# Altium PCB PCB.PcbDoc
Units mil, origin at the board's own origin, x right, y up, seen from the top; angles counter-clockwise.
Board outline 2990.1 x 1640.1 mil, 2 copper layers (Top Layer, Bottom Layer); 58 components, 36 nets, 149 pads, 4 vias.
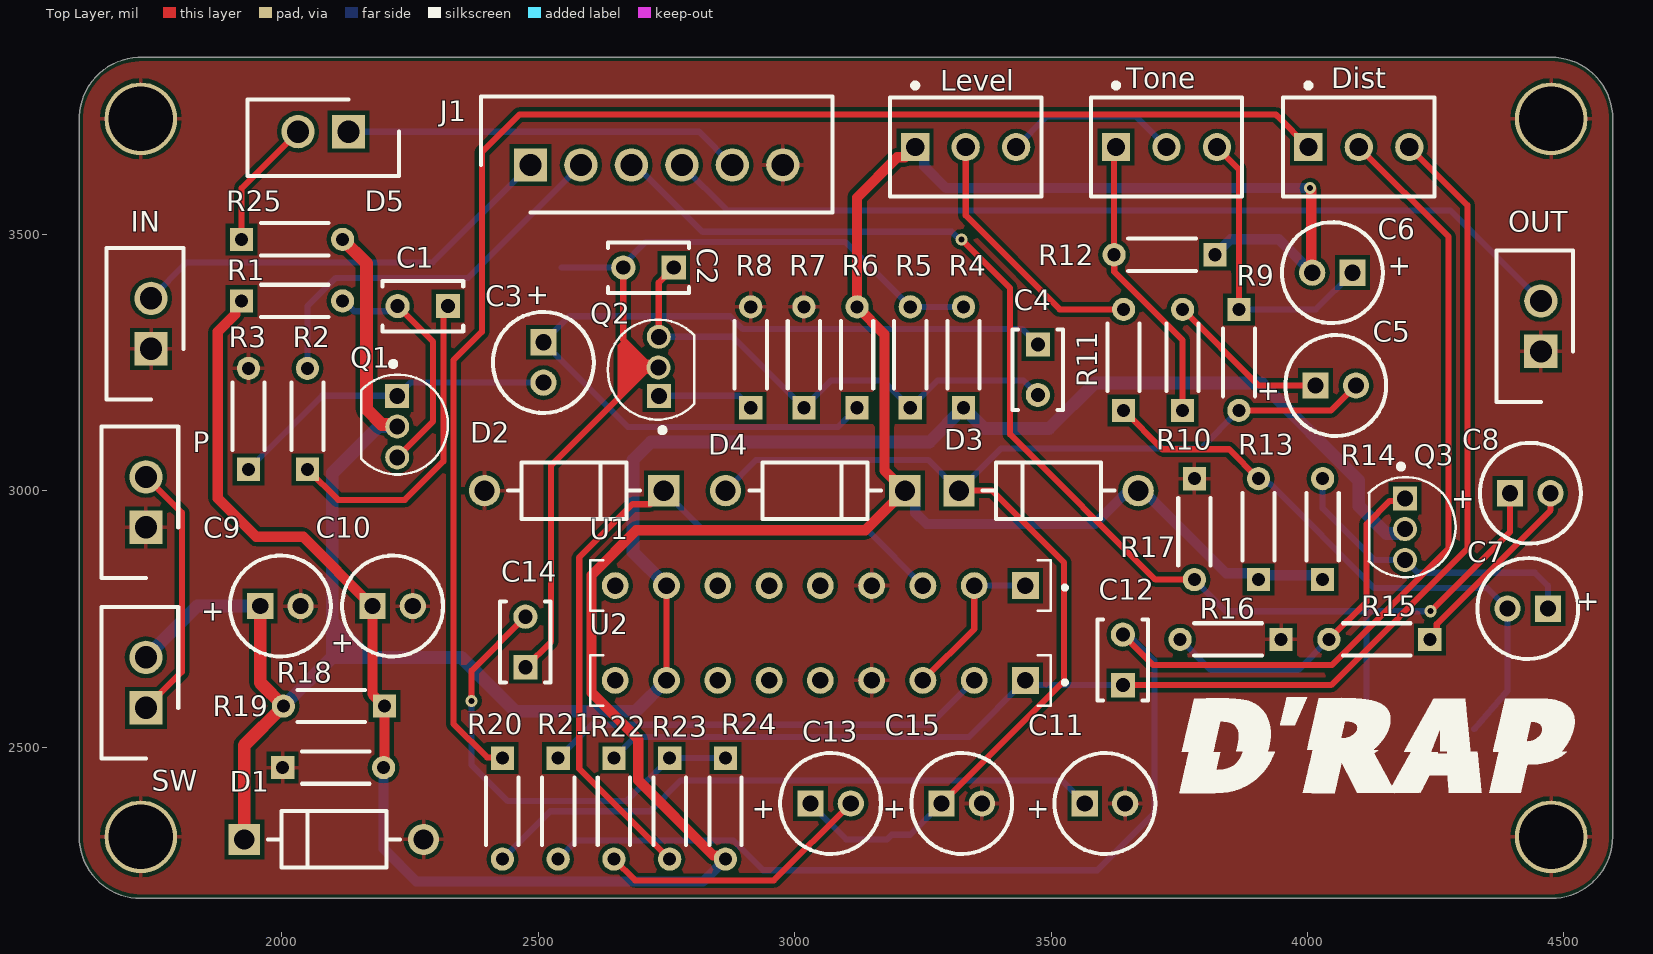
[diagram p0: Top Layer view]
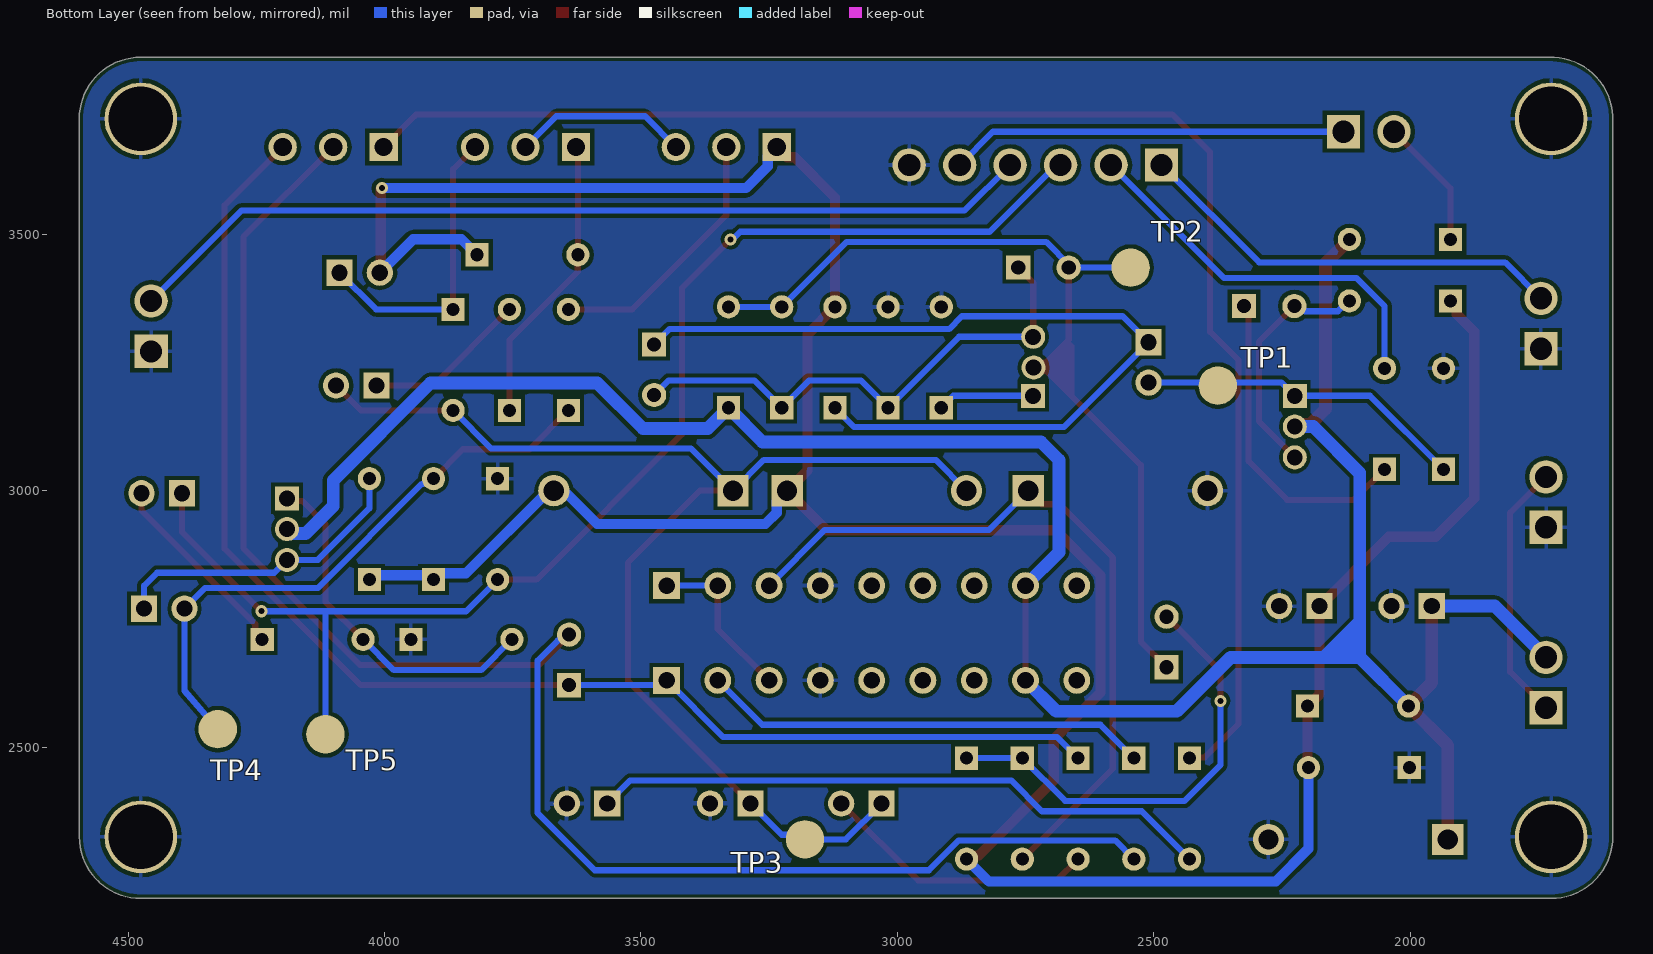
[diagram p1: Bottom Layer view, seen from below]
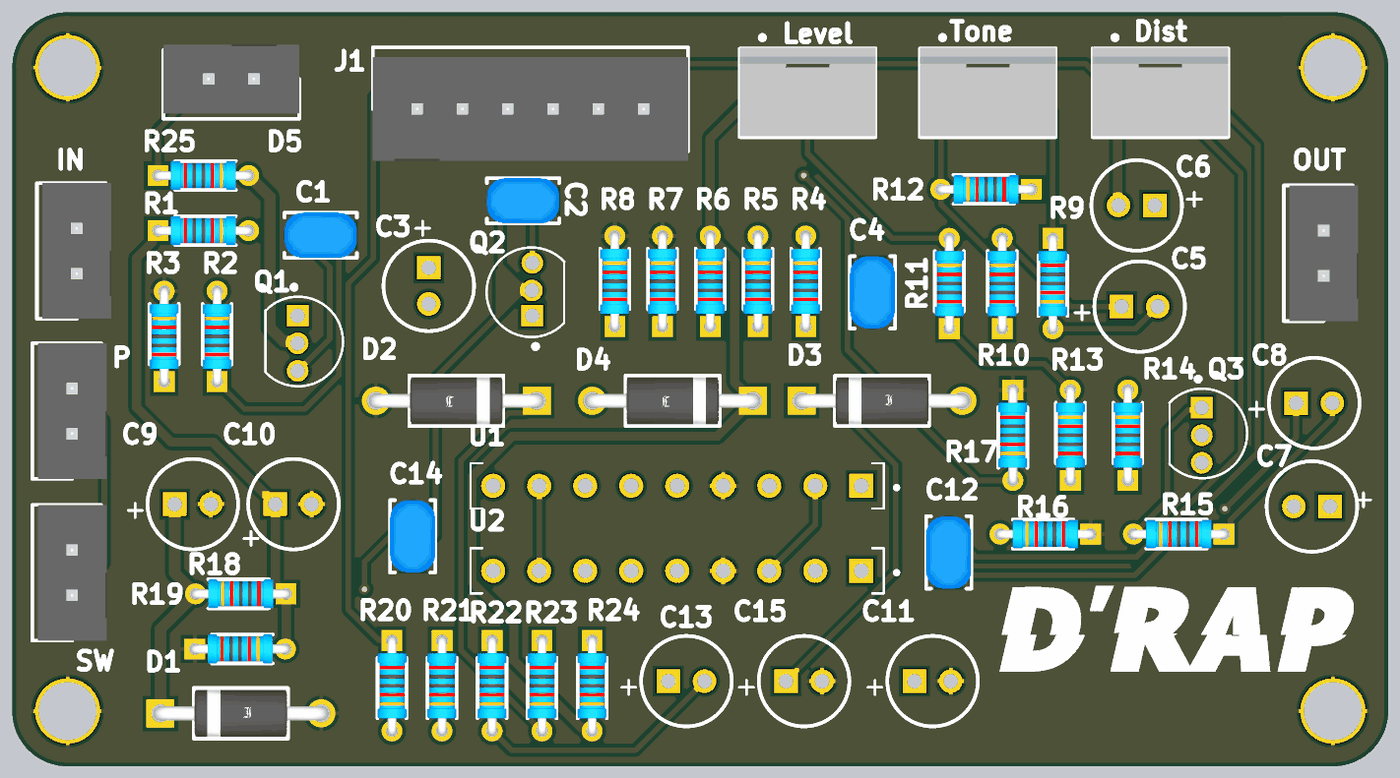
[diagram p2: 3D render of the assembled board from above, using the file's embedded part models]

## Layer stack, top to bottom
Top Solder: solder mask 0.4, Solder Resist, Dk 3.5
Top Layer: signal copper 1.4
Dielectric 1: dielectric 12.6, FR-4, Dk 4.8
Bottom Layer: signal copper 1.4
Bottom Solder: solder mask 0.4, Solder Resist, Dk 3.5

## Board outline
1725,2205 cw(c1725,2325) 1605,2325 1605,3720 cw(c1725,3725) 1730,3845 4474.9,3845 4475,3845.1 cw(c4475,3725) 4595.1,3725 4595.1,2325.1 4595,2325 cw(c4475,2325) 4475,2205

## Design rules (kind name [scope] priority, off if disabled: settings)
BoardOutlineClearance [All] p1: gap=7.87 ignorepadtopadclearanceinfootprint=FALSE
Clearance [All] p1: gap=8 ignorepadtopadclearanceinfootprint=FALSE except(9.84: Arc-Hole Track-Hole SMDPad-Hole THPad-Hole Via-Hole Fill-Hole Poly-Hole Region-Hole Text-Hole)
ComponentClearance [All] p1: gap=5 collisioncheckmode=3 verticalgap=5 showdistances=TRUE
DiffPairsRouting [All] p1: maxlimit=15 minlimit=8 mostfreqgap=8 toplayer_minwidth=8 toplayer_maxwidth=1000 toplayer_prefwidth=8 bottomlayer_minwidth=8 bottomlayer_maxwidth=1000 bottomlayer_prefwidth=8 maxuncoupledlength=500
Height [All] p1: minheight=0 maxheight=71497.94 prefheight=500
HoleSize [All] p1: absolutevalues=TRUE maxlimit=248.03 minlimit=11.81 maxpercent=80.000 minpercent=20.000
HoleToHoleClearance [All] p1: gap=9.84 allowstackedmicrovias=FALSE
MinimumAnnularRing [All] p1: minimumring=3
MinimumSolderMaskSliver [All] p1: minsoldermaskwidth=0
PlaneClearance [All] p1: clearance=8
PlaneConnect PlaneConnectPowerPads [InPadClass('PowerPads')] p1: planeconnectstyle=Direct reliefexpansion=20 reliefentries=4 reliefconductorwidth=10 reliefairgap=10
PlaneConnect [All] p2: pad.planeconnectstyle=Relief pad.reliefexpansion=11.81 pad.reliefentries=4 pad.reliefconductorwidth=8 pad.reliefairgap=8 via.planeconnectstyle=Direct via.reliefexpansion=11.81 via.reliefentries=4 via.reliefconductorwidth=5 via.reliefairgap=5
PolygonConnect PolygonConnectPowerPads [All vs (InPadClass('PowerPads'))] p1: connectstyle=Direct reliefconductorwidth=10 reliefentries=4 polygonreliefangle="90 Angle" airgapwidth=10
PolygonConnect [All] p2: thpad.connectstyle=Relief thpad.reliefconductorwidth=8 thpad.reliefentries=4 thpad.polygonreliefangle="90 Angle" thpad.airgapwidth=8 smdpad.connectstyle=Relief smdpad.reliefconductorwidth=8 smdpad.reliefentries=4 smdpad.polygonreliefangle="90 Angle" smdpad.airgapwidth=8 via.connectstyle=Direct via.reliefconductorwidth=5 via.reliefentries=4 via.polygonreliefangle="90 Angle" via.airgapwidth=5
RoutingVias [All] p1: holewidth=11.81 width=23.62 viastyle="Through Hole" minholewidth=11.81 minwidth=23.62 maxholewidth=23.62 maxwidth=259.84
SilkToSilkClearance [All] p1: silktosilkclearance=0
SilkToSolderMaskClearance [IsPad] p1: minsilkscreentomaskgap=5 clearancetoexposedcopper=TRUE
SolderMaskExpansion [All] p1: expansion=2.95 istentingtop=FALSE
SupplyNets "Schematic Supply Nets_2" [InNet('+4.5V')] p1: voltage=0.000
SupplyNets "Schematic Supply Nets_1" [InNet('GND')] p2: voltage=0.000
SupplyNets "Schematic Supply Nets" [InNet('+9V')] p3: voltage=0.000
Width [All] p1: maxlimit=1000 minlimit=8 preferedwidth=8 minimp=50.000000 maximp=50.000000 favimp=50.000000
20 further rules are at their usual default settings.

## Classes and differential pairs
component class "U_Transinstor Booster": C2 C3 C4 Q2 R4 R5 R6 R7 R8
component class U_Tone_Level: C5 C6 Level R9 R10 R11 R12 Tone
component class U_Selection: D5 IN J1 OUT R25
component class "U_Power Supply": C9 C10 D1 P R18 R19 SW
component class "U_Output Buffer": C7 C8 Q3 R13 R14 R15 R16 R17
component class "U_OpAmp gain stage": C11 C12 C13 C14 C15 D2 D3 D4 Dist R20 R21 R22 R23 R24 U1 U2
component class U_Input_Buffer: C1 Q1 R1 R2 R3

## Components (designator, comment, footprint, x,y, rotation, side; value= is the part's Value field where it differs from the comment)
C1 "47n" FP-RCE1A2-MFG 2275,3360 r180 top
C2 "250p" FP-RCE1A2-MFG 2715,3435 r180 top
C3 "0.47u" CAPPR55-200-1100X500X1200 2510,3250 r270 top
C4 "47n" FP-RCE1A2-MFG 3474.21,3235.79 r270 top
C5 "0.022u" CAPPR55-200-1100X500X1200 4055,3205 r0 top
C6 "0.1u" CAPPR55-200-1100X500X1200 4048.46,3425 r180 top
C7 "0.047u" CAPPR55-200-1100X500X1200 4429.37,2770 r180 top
C8 "1u" CAPPR55-200-1100X500X1200 4434.37,2995 r0 top
C9 "100u" CAPPR55-200-1100X500X1200 1997.2,2775 r0 top
C10 "47u" CAPPR55-200-1100X500X1200 2215.94,2775 r0 top
C11 "0.47u" CAPPR55-200-1100X500X1200 3605,2390 r0 top
C12 "100p" FP-RCE1A2-MFG 3640,2670 r90 top
C13 "0.47u" CAPPR55-200-1100X500X1200 3070,2390 r0 top
C14 "68n" FP-RCE1A2-MFG 2475,2705 r90 top
C15 "0.01u" CAPPR55-200-1100X500X1200 3325.63,2390 r0 top
D1 "1N4004" FP-1N4007-MFG 2101.57,2320 r0 top value=15pF
D2 "1N4148" FP-1N4007-MFG 2570,3000 r180 top value=15pF
D3 "1N4148" FP-1N4007-MFG 3495,3000 r0 top value=15pF
D4 "1N4148" FP-1N4007-MFG 3040,3000 r180 top value=15pF
D5 "B2B-EH-A" SHDR2W64P0X250_1X2_750X380X600P 2130,3700 r180 top
Dist "100K" TECO-171825-3_V 4100,3670 r0 top
IN "B2B-EH-A" SHDR2W64P0X250_1X2_750X380X600P 1745,3276.57 r90 top
J1 "B6B-XH-A_LF__SN_" SHDR6W64P0X250_1X6_1740X575X700P 2484.72,3635 r0 top
Level "100K" TECO-171825-3_V 3333.43,3670 r0 top
OUT "B2B-EH-A" SHDR2W64P0X250_1X2_750X380X600P 4455,3271.57 r90 top
P "B2B-EH-A" SHDR2W64P0X250_1X2_750X380X600P 1735,2928.5 r90 top
Q1 "2SC2240-GR_F,T_" SSM3K7002CFULF#1 2169.68,3250 r270 top
Q2 "2SC2240-GR_F,T_" SSM3K7002CFULF#2 2789.53,3115 r90 top
Q3 "2SC2240-GR_F,T_" SSM3K7002CFULF#1 4134.69,3050 r270 top
R1 "470K" FP-MRS1600-MFG 2020,3370 r0 top
R2 "1K" FP-MRS1600-MFG 2050,3140 r90 top
R3 "10K" FP-MRS1600-MFG 1935,3140 r90 top
R4 "10K" FP-MRS1600-MFG 3329.17,3260 r90 top
R5 "470K" FP-MRS1600-MFG 3225.43,3260 r90 top
R6 "100K" FP-MRS1600-MFG 3121.69,3260 r90 top
R7 "100K" FP-MRS1600-MFG 3017.95,3260 r90 top
R8 "22R" FP-MRS1600-MFG 2914.21,3260 r90 top
R9 "6.8K" FP-MRS1600-MFG 3866.26,3255 r270 top
R10 "2.2K" FP-MRS1600-MFG 3756.26,3255 r90 top
R11 "10K" FP-MRS1600-MFG 3641.26,3255 r90 top
R12 "6.8K" FP-MRS1600-MFG 3721.26,3460 r180 top
R13 "1M" FP-MRS1600-MFG 3904.37,2925 r90 top
R14 "1M" FP-MRS1600-MFG 4029.37,2925 r90 top
R15 "1K" FP-MRS1600-MFG 4140,2710 r180 top
R16 "10K" FP-MRS1600-MFG 3850,2710 r180 top
R17 "100k" FP-MRS1600-MFG 3779.37,2925 r270 top
R18 "10K" FP-MRS1600-MFG 2101.57,2580 r180 top
R19 "10K" FP-MRS1600-MFG 2100,2460 r0 top
R20 "4.7K" FP-MRS1600-MFG 2430.04,2380 r270 top
R21 "100K" FP-MRS1600-MFG 2538.78,2380 r270 top
R22 "2.2k" FP-MRS1600-MFG 2647.52,2380 r270 top
R23 "47K" FP-MRS1600-MFG 2756.26,2380 r270 top
R24 "100K" FP-MRS1600-MFG 2865,2380 r270 top
R25 "100K" FP-MRS1600-MFG 2020,3490 r0 top
SW "B2B-EH-A" SHDR2W64P0X250_1X2_750X380X600P 1735,2576.57 r90 top
Tone "20K" TECO-171825-3_V 3725,3670 r0 top
U1 "M5223L" SIP249W50P254L2281H508Q9 3050,2815 r180 top
U2 "M5223L" SIP249W50P254L2281H508Q9 3050,2630 r180 top

## Footprints (in the part's own frame and the unit in brackets; to place one, negate y for a bottom-side part, rotate by r counter-clockwise, add the part's x,y. Pads: shape width x height; smd on the part's side, far side on the other; paste and mask are expansions set on the pad)
CAPPR55-200-1100X500X1200 [mm] "THD, 2-Leads, Dia 5mm, Body Length 11mm"
  rect 1.3x1.3 hole 0.8: 1(-1,0)
  round 1.3 hole 0.8: 2(1,0)
  silkscreen extent -2.5,-2.5 2.5,2.5, body extent -2.5,-2.5 2.5,2.5, height 12
FP-1N4007-MFG [mm]
  rect 1.55x1.55 hole 1 paste-2539.97 mask+0: 1(-4.44,0)
  round 1.55 hole 1 paste-2539.97 mask+0: 2(4.44,0)
  silkscreen extent -3.26,-1.4 3.26,1.4, body extent -5.32,-1.5 5.32,1.5, height 0.25
FP-MRS1600-MFG [mm]
  rect 1.15x1.15 hole 0.65 paste-2539.97 mask+0: 1(-2.5,0)
  round 1.15 hole 0.65 paste-2539.97 mask+0: 2(2.5,0)
  silkscreen extent -1.55,-0.8 1.8,0.8, body extent -3.17,-0.9 3.17,0.9, height 0.25
FP-RCE1A2-MFG [mm]
  rect 1.2x1.2 hole 0.7 paste-2539.97 mask+0: 1(-1.25,0)
  round 1.2 hole 0.7 paste-2539.97 mask+0: 2(1.25,0)
  silkscreen extent -2,-1.25 2,1.25, body extent -2.1,-1.35 2.1,1.35, height 0.25
SHDR2W64P0X250_1X2_750X380X600P [mm]
  rect 1.65x1.65 hole 1.1: 1(0,0)
  round 1.65 hole 1.1: 2(2.5,0)
  silkscreen extent -2.5,-1.6 5,2.2, body extent -2.5,-1.9 5,1.9, height 6
SHDR6W64P0X250_1X6_1740X575X700P [mm]
  rect 1.65x1.65 hole 1.1: 1(0,0)
  round 1.65 hole 1.1: 2(2.5,0) 3(5,0) 4(7.5,0) 5(10,0) 6(12.5,0)
  silkscreen extent -2.45,-2.35 14.95,3.4, body extent -2.45,-2.88 14.95,2.88, height 7
SIP249W50P254L2281H508Q9 [mm]
  rect 1.328x1.328 hole 0.82: 1(-10.16,0)
  round 1.328 hole 0.82: 2(-7.62,0) 3(-5.08,0) 4(-2.54,0) 5(0,0) 6(2.54,0) 7(5.08,0) 8(7.62,0) 9(10.16,0)
  silkscreen extent -12.21,-1.25 11.41,1.25
SSM3K7002CFULF#1 [mm]
  rect 1.19x1.19 / inner round 1.19 / far side rect 1.19x1.19 hole 0.79: 1(1.651,1.405)
  round 1.19 hole 0.79: 2(3.175,1.405) 3(4.699,1.405)
  silkscreen extent -0.02,-0.38 5.55,3.91
SSM3K7002CFULF#2 [mm]
  rect 1.19x1.19 / inner round 1.19 / far side rect 1.19x1.19 hole 0.79: 1(1.778,1.385)
  round 1.19 hole 0.79: 2(3.175,1.405) 3(4.699,1.385)
  silkscreen extent -0.02,-0.38 5.55,3.91
TECO-171825-3_V [mm] "Connector, 3-Leads, Body 4.9x7.5mm, Pitch 2.5mm"
  rect 1.4x1.4 hole 0.9: 1(-2.5,0)
  round 1.4 hole 0.9: 2(0,0) 3(2.5,0)
  silkscreen extent -3.75,-2.45 3.75,3.17, body extent -3.75,-2.4 3.75,2.5, height 10.4

## Part data
C1 C2 C4 C12 C14: library part CMP-06035-023167-1, "Cap Ceramic 100nF 100V X7R ±10% Radial 2.5mm +125°C Automotive Bulk", Capacitance=100nF, Case/Package=Radial, Dielectric=X7R, Max Operating Temperature=125°C, Min Operating Temperature=-55°C, Package Quantity=500, Ratings=AEC-Q200, Resistor Type=Ceramic, Tolerance=10%, Voltage Rating=100V, Height=3.5mm, Height - Seated (Max)=0.138inch, Lead Diameter=0.5mm, Lead Free="Lead Free", Lead Pitch=0.098inch, Lead/Base Style=Straight, Length=0.157inch, Mount="Through Hole", Packaging=Bulk, Termination=Radial, Voltage Rating (DC)=100V, Width=0.098inch
C3 C5 C6 C7 C8 C9 C10 C11 C13 C15: library part CMP-1665-00036-2, "Aluminum Electrolytic Capacitor, 22 uF, +/- 20%, 50 V, -40 to 85 degC, 2-Pin THD, RoHS, Bulk", Capacitance=22uF, Case/Package=Radial, Leakage Current=3uA, Manufacturer=Panasonic, Max Operating Temperature=85degC, Min Operating Temperature=-40degC, Package Description="2-Pin Radial Lead, Dia 5 mm, Height 12 mm", Package Quantity=200, Package Reference=CAPPR55-200-1100X500X1200, Ripple Current=100mA, Tolerance=20%, Voltage=50V, Datasheet URL=https://industrial.panasonic.com/cdbs/www-data/pdf/RDF0000/ABA0000C1218.pdf, Datasheet Version="Rev. 05, 10/2016", Diameter=5mm, Dissipation Factor=0.12%, Height=11mm, Height - Seated (Max)=0.472inch, Lead Diameter=0.5mm, Lead Pitch=2mm, Lead/Base Style=Straight, Length=11mm, Life (Hours)=2000Hour, Manufacturer URL=http://www.panasonic.com/, Mount=ThroughHole, Packaging=Bulk, Radiation Hardening=No, REACH SVHC=NoSVHC, Ripple Current (AC)=100mA, RoHSCompliant=true, Termination=Radial, Voltage Rating=50V, Voltage Rating (DC)=50V
D1 D2 D3 D4: library part CMP-123542-000001-1, "Rectifier diode 1000 V 1 A DO-41, ,", Capacitance=15pF, Forward Current=1A, Manufacturer=Diotec, Manufacturer Part Number=1N4007, Max Junction Temp=+175°C, Max Repetitive Reverse Voltage=1000V, Max Surge Forward Current=27A, Peak Reverse Current=5uA, Temperature="-50°C to +175°C", Temperature Range Low=-50°C, Automotive=No, Category=Diode, ComponentLink2Description=Datasheet, ComponentLink2URL=https://datasheet.octopart.com/1N4007-Diotec-datasheet-62346875.pdf, Device Class L1="Discrete Semiconductors", Device Class L2=Diodes, Device Class L3="Rectifier Diodes", Height=2.8mm, Ipc Land Pattern Name=DIOAD888W100L520D280, Lead Free=Yes, Octopart=https://octopart.com/1n4007-diotec-4040411, Package=1N4007, Reverse Voltage=1000V, RoHS=TRUE, Temperature Range High=+175°C
D5 IN OUT P SW: "Connector", Manufacturer_Name="JST (JAPAN SOLDERLESS TERMINALS)", Datasheet Link=http://www.jst-mfg.com/product/pdf/eng/eEH.pdf, Height=6mm, Manufacturer_Part_Number=B2B-EH-A
Dist Level Tone: library part CMP-2000-07494-1, "Male Header, Pitch 2.5 mm, 1 x 3 Position, Height 10.4 mm, Tail Length 3.6 mm,  / -20 to 95 degC / , RoHS, Bulk", Colour=Natural, Contact Resistance=20mOhm, Flammability Rating=UL94V-0, Manufacturer="TE Connectivity", Max Current Rating=3.5A, Max Operating Temperature=95degC, Max Voltage Rating (AC)=250V, Max Voltage Rating (DC)=350.25kV, Min Operating Temperature=-20degC, Package Description="Male Header, Pitch 2.5 mm, 1 x 3 Position, Height 10.4 mm, Tail Length 3.6 mm", Package Quantity=1000, Package Reference=171825-3, Voltage Rating=350V, Approvals=UL, Backwall/Post Interruptions=No(Without), Connector Type=Header, Contact Gender=Male, Contact Material=Brass, Contact Mating Length=0.295inch, Contact Plating=Tin, Contact Retention=No(Without), Contact Shape=Square, Datasheet URL=http://www.te.com/commerce/DocumentDelivery/DDEController?Action=showdoc&DocId=Customer+Drawing%7F171825%7FY3%7Fpdf%7FEnglish%7FENG_CD_171825_Y3.pdf%7F171825-3, Datasheet Version="Rev. Y3, 12/2016", Depth=4.9mm, Height=0.409inch, Housing Colour=Natural, Housing Material=Nylon, Length=7.5mm, Manufacturer URL=http://www.te.com/, Mating Alignment=Yes(With), Mating Post Length=7.5mm, Mating Retention=Yes(With), Mount=ThroughHole, Mounting Technology=ThroughHole, Number of Contacts=3, Number of Positions=3, Number of Rows=1, Orientation=Straight, Packaging=Bag, Panel Mount Retention=No(Without), PCB Mount Alignment=No(Without), PCB Mount Retention=Without, PCB Mounting Orientation=Vertical, PCB Thickness=0.063inch, Pitch=2.5mm, Plating Thickness=0.8um, REACH SVHC=NoSVHC, RoHSCompliant=True, Strain Relief=No(Without), Tail Length=0.142inch, Termination=Solder
J1: "Connector", Arrow Part Number=B6B-XH-A(LF)(SN), Manufacturer_Name="JST (JAPAN SOLDERLESS TERMINALS)", Mouser Part Number=306-B6BXHALFSN, Arrow Price/Stock=https://www.arrow.com/en/products/b6b-xh-a-lf-sn/jst-manufacturing?region=europe, Datasheet Link=https://datasheet.lcsc.com/szlcsc/JST-Sales-America-B6B-XH-A-LF-SN_C144397.pdf, Height=7mm, Manufacturer_Part_Number=B6B-XH-A(LF)(SN), Mouser Price/Stock=https://www.mouser.co.uk/ProductDetail/JST-Commercial/B6B-XH-ALFSN?qs=cdbOS8ANM9AKmMmofXbwlw%3D%3D
Q1 Q2 Q3: "Transistor BJT NPN", Manufacturer_Name=Toshiba, Manufacturer_Part_Number=2SC2240-GR(F,T), Mouser Part Number=757-2SC2240-GRFT, Datasheet Link=https://datasheet.octopart.com/2SC2240GR-Toshiba-datasheet-109832.pdf, Mouser Price/Stock=https://www.mouser.co.uk/ProductDetail/Toshiba/2SC2240-GRFT?qs=%2FsslhGPpiOR3XjNwkR44HA%3D%3D
R1 R2 R3 R4 R5 R6 R7 R8 R9 R10 R11 R12 R13 R14 R15 R16 R17 R18 R19 R20 R21 R22 R23 R24 R25: library part CMP-02408-000019-1, "RES 20K OHM 0.4W 1% AXIAL", Case/Package=Conformal, Max Operating Temperature=155°C, Max Power Dissipation=400mW, Min Operating Temperature=-55°C, Resistance=20kR, Resistor Type="Metal Film", Temperature Coefficient=50ppm/°C, Tolerance=1%, Construction=Cylindrical, Contact Plating=Tin, Diameter=1.6mm, Length=3.6mm, Military Standard=Not, Mount="Through Hole", Number of Terminations=2, Packaging="Tape and Reel", Power Rating=400mW, Radiation Hardening=No, RoHS Compliant=Yes, Series=MRS16, Technology="THIN FILM", Termination=Axial
U1 U2: library part Component_1

## Free pads (board coordinates)
  round 141.73 hole 125.98: 10(1725,3725) 11(4475,3725) 12(4475,2325) 13(1725,2325)
  round 75 smd far side: 14(2375,3205) 15(2545,3435) 16(3180,2320) 17(4325,2535) 18(4115,2525)

## Via types
v1: diameter 23.62, hole 11.81, Top Layer to Bottom Layer, tented both sides, 4 vias

## Nets (pads, with @x,y where several pads share a name; then routed paths per layer and width w, separated by ;. In a path a pad name is that pad's centre, name@x,y a point inside that pad or via, vN(x,y) a via of type N, cw(c..) or ccw(c..) an arc to the next point about the centre after c; other vN are vias at no path point)
+4.5V: C6.2 C10.1 D3.2 D4.1 Level.1 R1.1 R6.2 R12.1 R13.1 R14.1 R18.1 R19.2 R24.2 | length 6273.4
  Top Layer w12: v1(4005,3590) v1@4007.05,3587.95 ; C6.2@4007.05,3427.05 C6.2
  Top Layer w20: R1.1 1908.94,3357.36 1908.94,3343.94 1875,3310 1875,2985 1950,2910 2041.57,2910 C10.1 2176.57,2603.43 R18.1 2200,2461.57 R19.2 ; R24.2 2857.87,2288.71 2841.29,2288.71 2695,2435 2695,2515 2604,2606 2604,2835.51 2691.23,2922.75 3137.55,2922.75 D4.1 3175,3039.8 3175,3305.12 R6.2 3121.69,3571.69 3200.13,3650.13 3215.13,3650.13 Level.1 ; C6.2@4007.05,3427.05 v1@4007.05,3587.95
  Bottom Layer w20: R19.2 2198.43,2301.57 2262,2238 2821.43,2238 R24.2 ; D4.1 3235.19,2979.61 3235.19,2956.94 3257.13,2935 3585,2935 3642.15,2992.15 3661.95,2992.15 D3.2 3680.03,3000 3840.95,2839.09 3891.86,2839.09 R13.1 3912.8,2835 4020.94,2835 R14.1 ; Level.1 3252.56,3652.44 3252.56,3632.44 3295,3590 v1(4005,3590) ; R12.1 3849.69,3490 3944.09,3490 C6.2
+9V: C9.1 D1.1 Q1.2 Q3.2 R4.1 R18.2 R25.2 SW.2 U1.8 U2.8 | length 4780
  Top Layer w12: U2.8 U1.8
  Top Layer w25: D1.1 1926.77,2503.62 R18.2 1957.83,2625.32 C9.1 ; R25.2 2165,3443.43 2165,3159.16 2194.98,3129.18 2220.82,3129.18 Q1.2
  Bottom Layer w25: SW.2 1835,2775 C9.1 ; R18.2 2098.15,2675 ; Q1.2 2189,3125 2098.15,3034.15 2098.15,2675 ; U2.8 2690,2570 2455,2570 2350,2675 2098.15,2675 ; U1.8 2685,2880 2685,3060 2720,3095 3262.6,3095 R4.1 3369.75,3121 3496,3121 3585,3210 3910,3210 4100,3020 4100,2970 4153.79,2916.21 4187.53,2916.21 Q3.2@4188.74,2915
C_in: J1.2 R2.2 | length 768.6
  Bottom Layer w12: R2.2 2050,3360 2105,3415 2363.15,3415 J1.2
C_out: C8.1 J1.3 pad.18 R17.2 | length 2619.9
  Top Layer w12: v1(3325,3490) 3420,3395 3420,3110 3703.43,2826.57 R17.2 ; v1(4240,2765) 4395,2920 C8.1
  Bottom Layer w12: J1.3 2690,3635 2820,3505 3306.33,3505 3321.33,3490 v1(3325,3490) ; R17.2 3840.94,2765 4115,2765 ; pad.18 4115,2765 ; v1(4240,2765) 4115,2765
GND: C9.2 C10.2 C11.2 C15.2 D1.2 D2.2 IN.1 J1.6 OUT.1 P.1 pad.10 pad.11 pad.12 pad.13 R3.2 R7.2 R8.2 R16.1 R17.1 R19.1 U1.4 U2.4
Input_sig: IN.2 J1.1 | length 847.4
  Bottom Layer w12: IN.2 1815,3445 2294.72,3445 J1.1
LED_neg: D5.1 J1.5 | length 775.3
  Bottom Layer w12: D5.1 2813.43,3700 J1.5
NetC1_1: C1.1 R2.1 | length 627.6
  Top Layer w12: R2.1 2109.57,2982 2240,2982 2315,3057 2315,3350.79 C1.1
NetC1_2: C1.2 Q1.3 R1.2 | length 472.5
  Top Layer w12: Q1.3 2295,3135 2295,3290.79 C1.2
  Bottom Layer w12: R1.2 2120.78,3370 2140.78,3350 2205.17,3350 2215.17,3360 C1.2
NetC2_1: C2.1 C4.2 Q2.3 R5.1 R7.1 | length 1021.8
  Top Layer w12: Q2.3 2735,3405.79 C2.1
  Bottom Layer w12: Q2.3 2879.53,3300 R7.1 3071.38,3215 3172.01,3215 R5.1 3278.86,3215 3445.79,3215 C4.2
NetC3_1: C3.1 C4.1 R6.1 | length 1703.7
  Bottom Layer w12: R6.1 3084.12,3124 2675.37,3124 C3.1 2560.63,3340 2874,3340 2899,3315 3444.21,3315 C4.1
NetC5_1: C5.1 R10.2 | length 320.9
  Top Layer w12: R10.2 3904.69,3205 C5.1
NetC6_1: C6.1 R9.1 Tone.3 | length 585.5
  Top Layer w12: Tone.3 3866.26,3627.17 R9.1
  Bottom Layer w12: R9.1 4016.26,3353.43 C6.1
NetC7_1: C7.1 Q3.3 R14.2 | length 604.3
  Bottom Layer w12: R14.2 4029.37,2965.63 4130,2865 Q3.3 4215,2840 4443.3,2840 4468.74,2814.56 C7.1
NetC8_2: C8.2 R15.1 | length 382.7
  Top Layer w12: R15.1 4251.87,2723.45 4251.87,2739.95 4474.02,2962.1 4474.02,2994.72 C8.2
NetC11_1: C11.1 R20.2 | length 1217.8
  Bottom Layer w12: R20.2 2523.47,2375 2717.91,2375 2777.91,2435 3520.63,2435 C11.1
NetC12_1: C12.1 Dist.3 R22.1 U2.1 | length 2671.1
  Top Layer w12: C12.1 4045.79,2620.79 4311.69,2886.69 4311.69,3556.74 Dist.3
  Bottom Layer w12: R22.1 2689.09,2520 3340,2520 U2.1 3459.21,2620.79 C12.1
NetC12_2: C12.2 Dist.2 R21.2 | length 3225.3
  Top Layer w12: C12.2 3699.21,2660 4047.63,2660 4275,2887.37 4275,3495 Dist.2
  Bottom Layer w12: R21.2 2575.42,2318.21 2880.18,2318.21 2938.39,2260 3590,2260 3701.43,2371.43 3701.43,2668.57 3662.58,2707.42 3662.41,2707.42 C12.2@3651,2718.83
NetC13_2: C13.2 R22.2 | length 541.2
  Top Layer w12: R22.2 2689.09,2240 2959.37,2240 C13.2
NetC14_2: C14.2 R23.1 R24.1 | length 891.3
  Top Layer w12: v1(2370,2590) 2370,2649.21 C14.2
  Bottom Layer w12: v1(2370,2590) 2370,2465 2440,2395 2672.83,2395 R23.1 R24.1
NetD2_1: D2.1 R23.2 U1.3 | length 1461.9
  Top Layer w12: D2.1 2718.29,2973.49 2683.49,2973.49 2580,2870 2580,2457.83 R23.2
  Bottom Layer w12: D2.1 2821.8,2923 3142,2923 U1.3
NetD5_2: D5.2 R25.1 | length 255.6
  Top Layer w12: R25.1 1921.57,3590 D5.2
NetDist_1: Dist.1 R20.1 | length 2928.6
  Top Layer w12: R20.1 2428.55,2479.91 2400.09,2479.91 2335,2545 2335,3255 2390,3310 2390,3660 2435,3705 2463.33,3733.33 3938.25,3733.33 3940.59,3730.98 Dist.1
NetLevel_2: Level.2 R11.2 | length 517.1
  Top Layer w12: Level.2 3333.43,3536.57 3516.57,3353.43 R11.2
NetLevel_3: Level.3 Tone.2 | length 342.9
  Bottom Layer w12: Level.3 3491.85,3730 3665,3730 Tone.2
NetP_2: P.2 SW.1 | length 508.3
  Top Layer w12: SW.1 1805,2646.57 1805,2956.93 P.2
NetQ2_1: Q2.1 R8.1 | length 188.9
  Bottom Layer w12: Q2.1 2890.79,3185 R8.1
NetQ3_1: Q3.1 R15.2 R16.2 | length 678.8
  Top Layer w12: R15.2 4115,2783.43 4115,2935 4160,2980 Q3.1@4180,2980
  Bottom Layer w12: R16.2 3811.57,2650 3981.57,2650 R15.2
NetR10_1: R10.1 R12.2 Tone.1 | length 570.2
  Top Layer w12: Tone.1 3622.83,3666.26 R12.2 3623.15,3459.68 3623.15,3426.85 3756.26,3293.74 R10.1
NetR21_1: R21.1 U2.2 | length 874
  Bottom Layer w12: R21.1 2603.85,2543.5 3263.5,2543.5 U2.2
NetU1_1: U1.1 U1.2 U2.3 | length 326.4
  Top Layer w12: U2.3 3350,2730 U1.2
  Bottom Layer w12: U1.2 U1.1
Output_sig: J1.4 OUT.2 | length 1784.8
  Bottom Layer w12: J1.4 2869,3546 4279,3546 OUT.2
TP1: C3.2 pad.14 Q1.1 R3.1 | length 645
  Bottom Layer w12: R3.1 2078.43,3185 Q1.1 2250.63,3210.63 C3.2
TP2: C2.2 C14.1 pad.15 Q2.2 R4.2 R5.2 | length 1793.5
  Top Layer w12: C14.1 2525,2705.79 2525,3050 2708.33,3233.33 2727.54,3233.33 Q2.2 2724.78,3240 2714.6,3250.19 2709.81,3250.19 2665.79,3294.21 C2.2
  Bottom Layer w12: pad.15 C2.2 ; C2.2@2662.89,3437.89 2710,3485 3098.86,3485 R5.2 R4.2
TP3: C5.2 C13.1 C15.1 D3.1 D4.2 pad.16 R9.2 | length 2509.1
  Top Layer w12: C15.1 3525,2628.74 3525,2860 3385,3000 D3.1 ; R9.2 4045.94,3156.57 C5.2
  Bottom Layer w12: D4.2 2925.2,3060 3260.2,3060 D3.1 3402.2,3082 3791.69,3082 R9.2 ; C13.1 3100.63,2320 pad.16 3189.11,2329.11 3225.37,2329.11 C15.1
TP4: C7.2 pad.17 R11.1 R13.2 | length 1168.1
  Top Layer w12: R11.1 3716.94,3080.9 3846.9,3080.9 R13.2
  Bottom Layer w12: R13.2 3914.46,3023.43 3924.85,3013.04 3926.96,3013.04 4130,2810 4350,2810 C7.2 4390,2610 pad.17
pads on no net: U1.5 U1.6 U1.7 U1.9 U2.5 U2.6 U2.7 U2.9

## Polygon pours and split planes (outlines as drawn)
GND on Top Layer "GND_L01_P002" (solid, pour order 2): 1725,2205 cw(c1725,2325) 1605,2325 1605,3720 cw(c1725,3725) 1730,3845 4474.9,3845 4475,3845.1 cw(c4475,3725) 4595.1,3725 4595.1,2325.1 4595,2325 cw(c4475,2325) 4475,2205
GND on Bottom Layer "GND_L02_P003" (solid, pour order 3): 1725,2205 cw(c1725,2325) 1605,2325 1605,3720 cw(c1725,3725) 1730,3845 4474.9,3845 4475,3845.1 cw(c4475,3725) 4595.1,3725 4595.1,2325.1 4595,2325 cw(c4475,2325) 4475,2205

## Other copper
Top Layer:
  region net TP2: 2665.79,3294.21 2655,3283.43 2655,3180.4 2719.69,3245.09 2714.91,3245.09
Bottom Layer:
  region net +9V: 2215,2680 2180,2680 2100,2760 2098.15,2758.15 2098.15,2675

## Silkscreen, mask and mechanical layers (free items; w line width, h text height)
Top Overlay:
  drawing of 4 lines, arcs and shapes, not listed
Bottom Overlay:
  text "TP2" at 2505,3485 h40
  text "TP1" at 2330,3240 h40
  text "TP5" at 4075,2455 h40
  text "TP4" at 4340,2435 h40
  text "TP3" at 3325,2255 h40
Mechanical 1:
  lines w10: 4474.9,3845 1730,3845 ccw(c1725,3725) 1605,3720 1605,2325 ccw(c1725,2325) 1725,2205 4475,2205 ccw(c4475,2325) 4595,2325 ; 4475,3845.1 cw(c4475,3725) 4595.1,3725 4595.1,2325.1

## Text inside footprints (layer, text, board x,y; h text height)
C3: Top Overlay "+" at 2480.98,3403.86 h40 r270
C5: Top Overlay "+" at 3901.14,3175.98 h40
C6: Top Overlay "+" at 4202.32,3454.02 h40 r180
C7: Top Overlay "+" at 4570,2800 h40 r180
C8: Top Overlay "+" at 4280.51,2965.98 h40
C9: Top Overlay "+" at 1843.35,2745.98 h40
C10: Top Overlay "+" at 2095,2685 h40
C11: Top Overlay "+" at 3451.14,2360.98 h40
C13: Top Overlay "+" at 2916.14,2360.98 h40
C15: Top Overlay "+" at 3171.77,2360.98 h40